# Altium PCB FlameClock_1.1_sh2.PcbDoc
Units mm, origin at the board's own origin, x right, y up, seen from the top; angles counter-clockwise.
Board outline 75.8 x 54.1 mm, 2 copper layers (Top, Bottom); 41 components, 272 nets, 184 pads, 44 vias.
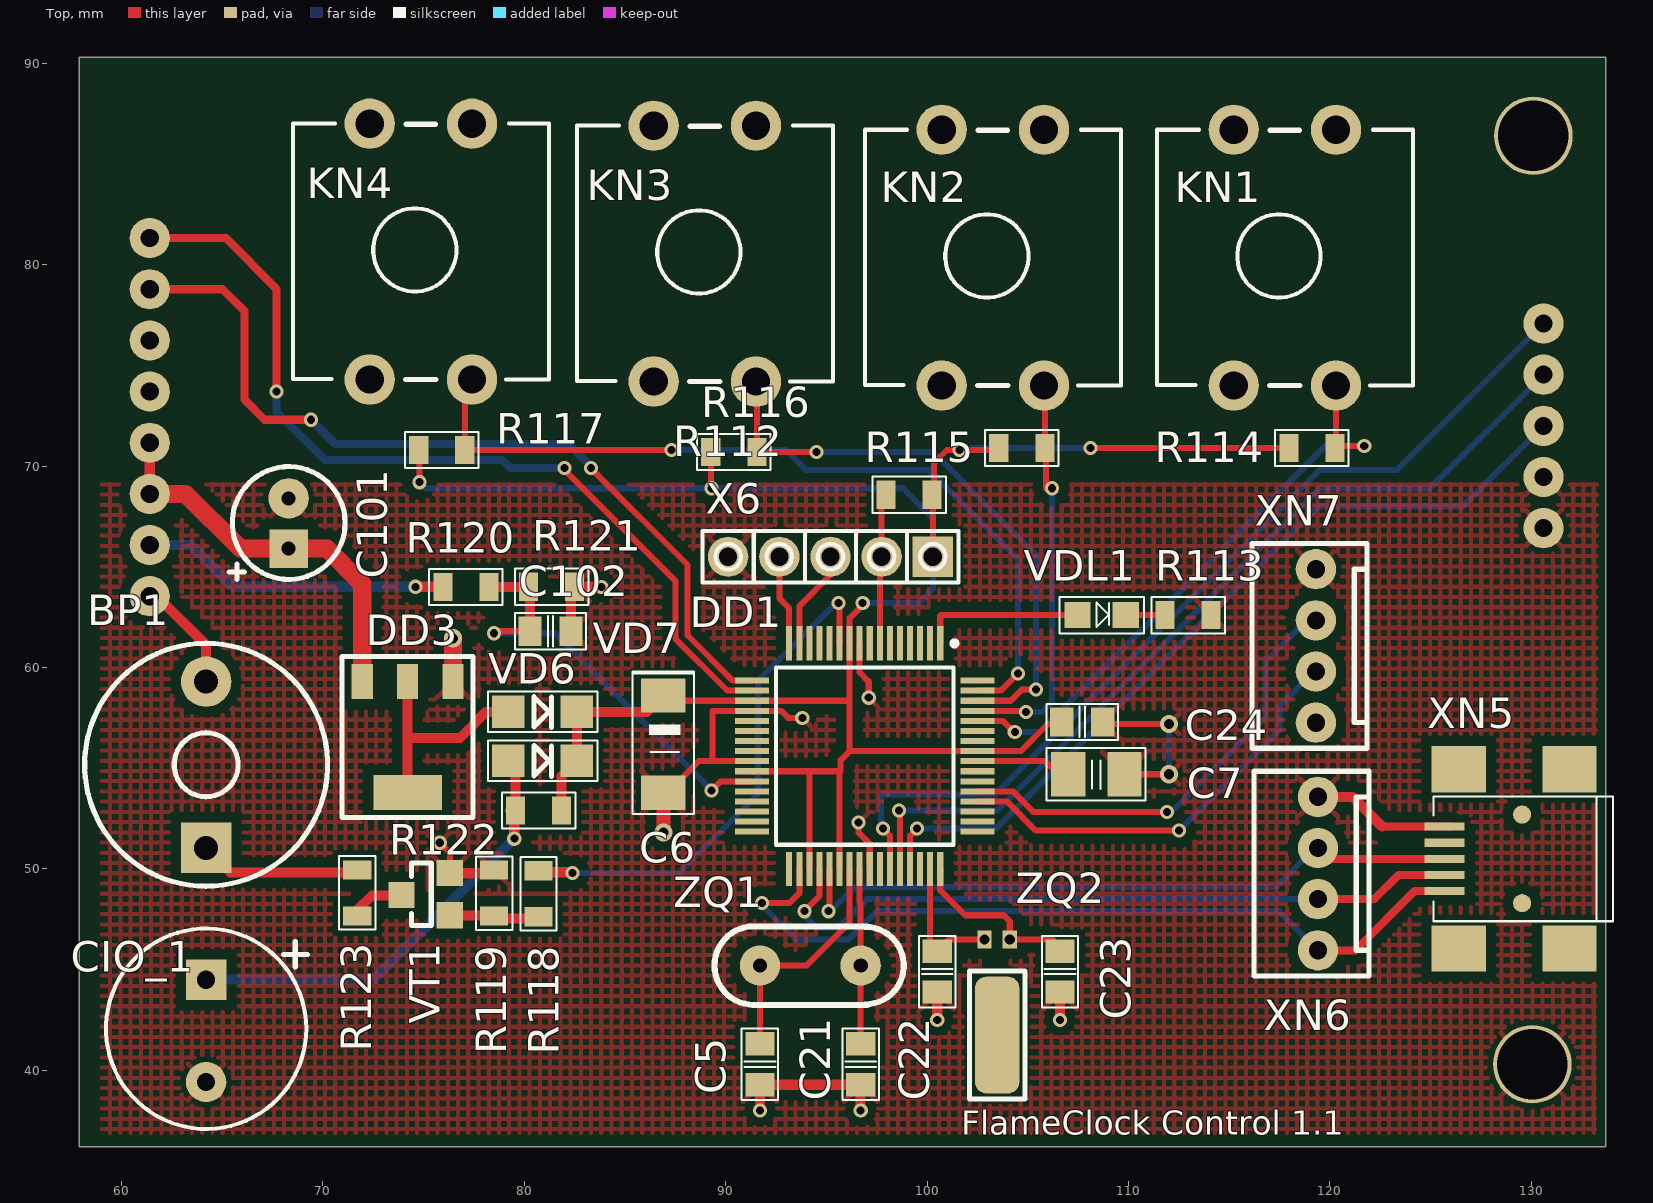
[diagram p0: Top view]
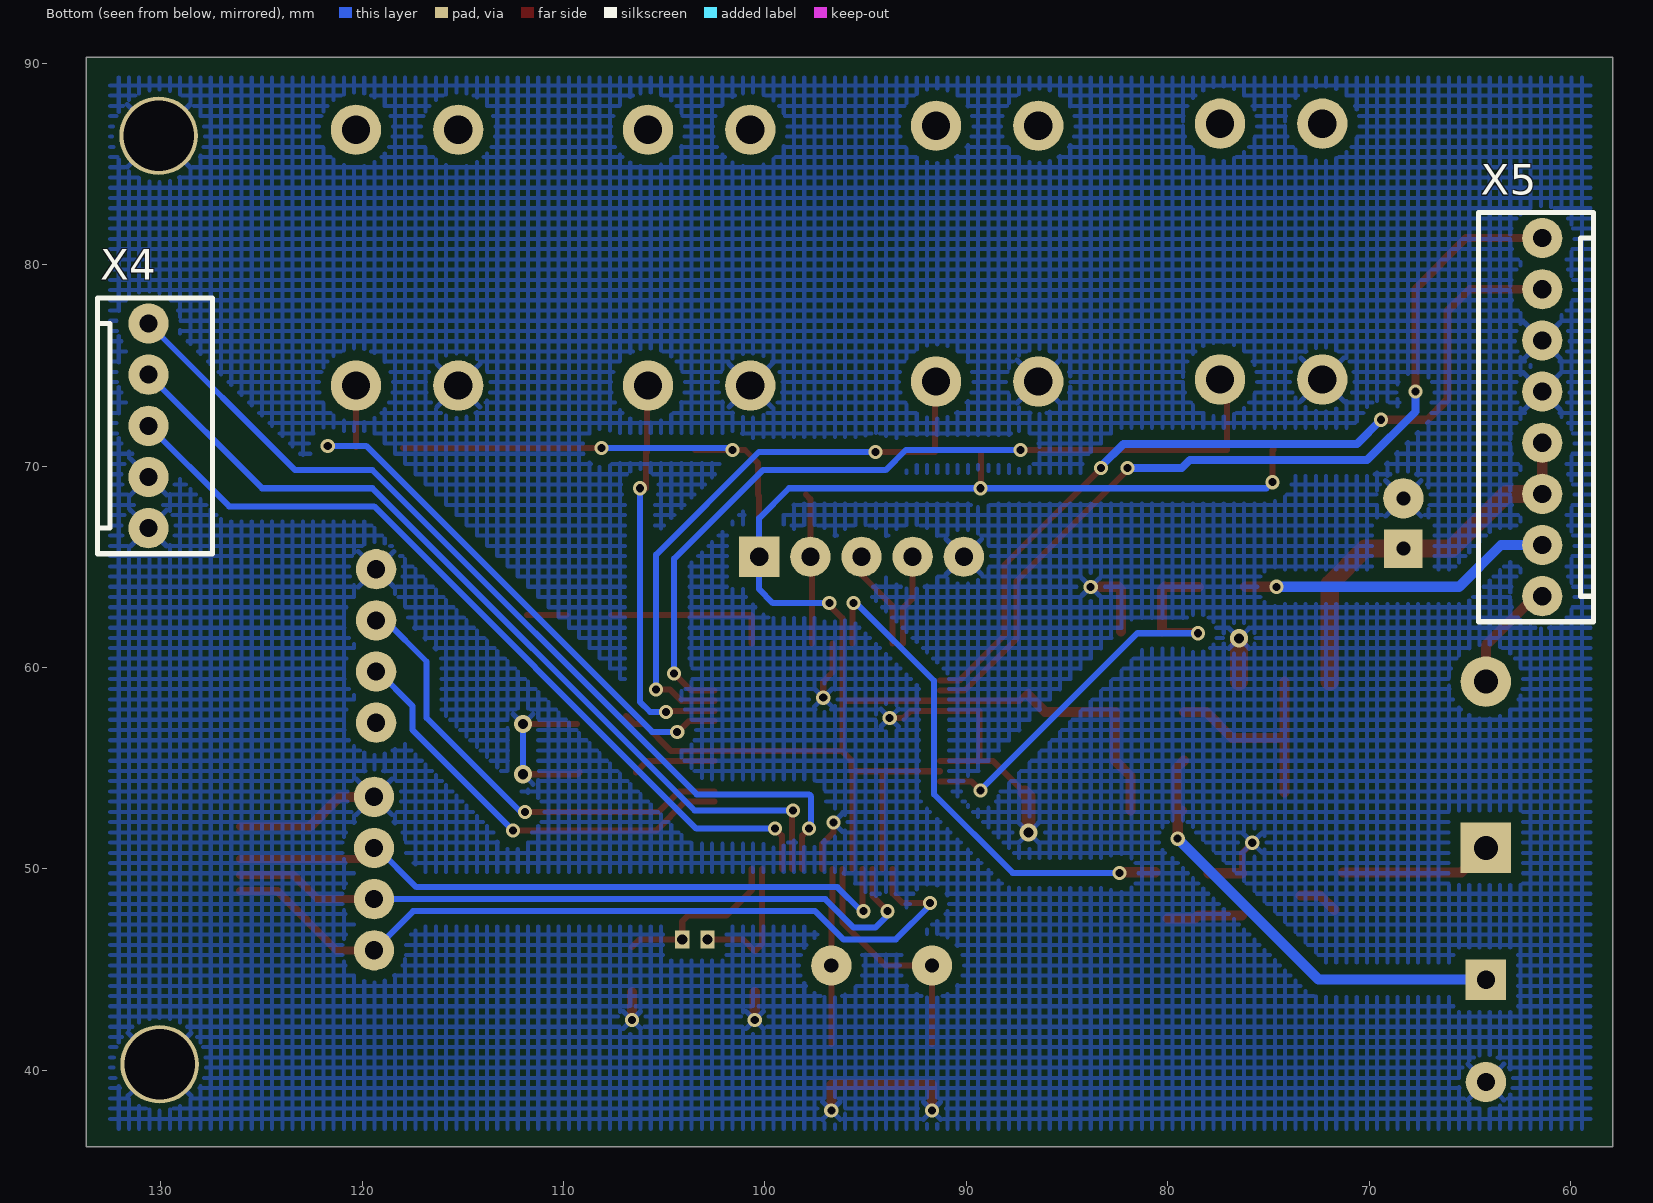
[diagram p1: Bottom view, seen from below]

## Layer stack, top to bottom
Top Solder: solder mask 0.0102, Solder Resist, Dk 3.5
Top: signal copper 0.0356
Dielectric 1: dielectric 0.32, FR-4, Dk 4.8
Bottom: signal copper 0.0356
Bottom Solder: solder mask 0.0102, Solder Resist, Dk 3.5

## Board outline
57.9,36.2 133.7,36.2 133.7,90.3 57.9,90.3

## Design rules (kind name [scope] priority, off if disabled: settings)
Clearance [All] p1: gap=0.2 ignorepadtopadclearanceinfootprint=TRUE except(0.5: Arc-Fill Arc-Poly Arc-Region Track-Fill Track-Poly Track-Region SMDPad-Fill SMDPad-Poly SMDPad-Region THPad-Fill THPad-Poly THPad-Region Via-Fill Via-Poly Via-Region Fill-Fill Fill-Poly Fill-Region Poly-Poly Poly-Region Region-Region)
Clearance Clearance_poligon [InPolygon] p2: gap=0.5 ignorepadtopadclearanceinfootprint=TRUE
PolygonConnect [All] p1: connectstyle=Relief reliefconductorwidth=0.254 reliefentries=4 polygonreliefangle="45 Angle" airgapwidth=0.254
RoutingVias [All] p1: holewidth=0.4 width=0.7 viastyle="Through Hole" minholewidth=0.4 minwidth=0.7 maxholewidth=0.9 maxwidth=1.5
SolderMaskExpansion [All] p1: expansion=0.102
Width [All] p1: maxlimit=0.9 minlimit=0.3 preferedwidth=0.5 minimp=50.000000 maximp=50.000000 favimp=50.000000
30 further rules are at their usual default settings.

## Components (designator, comment, footprint, x,y, rotation, side; value= is the part's Value field where it differs from the comment)
BP1 "*" ZIPPER 64.2,51.045 r90 top (schematic designator BP?)
C5 "33p" CC0805_S 91.7,40.3 r270 top
C6 "47uf 10v" CC0805_C_TANTAL_POLAR 86.9,56.2 r90 top
C7 "10uf" CC0805_B 108.4,54.7 r0 top
C21 "33p" CC0805_S 96.7,40.3 r270 top
C22 "33p" CC0805_S 100.5,44.9 r270 top
C23 "33p" CC0805_S 106.6,44.9 r270 top
C24 "C0805_S" CC0805_S 107.7,57.3 r0 top value=220n
C101 "100uf 25v" CE2.5 68.3,68.4 r270 top (schematic designator CIO1)
C102 "33p" CC0805_S 81.3,61.8 r180 top
CIO_1 "*" CE10 64.2,39.42 r90 top
DD1 "PIC24FJ64GB106" TQFP-64 96.9,55.6 r270 top
DD3 "LD1117S" SOT223 76.45,59.3 r180 top value=3.3v
KN1 "*" KNOP_12X12 115.22,74 r90 top
KN2 "*" KNOP_12X12 100.72,74 r90 top
KN3 "*" KNOP_12X12 86.42,74.2 r90 top
KN4 "*" KNOP_12X12 72.32,74.3 r90 top
R112 "100k" R0805_S 99.1,68.58 r180 top
R113 "10k" R0805_S 112.957,62.6 r180 top
R114 "10k" R0805_S 119.1,70.9 r0 top
R115 "10k" R0805_S 104.7,70.9 r0 top
R116 "10k" R0805_S 90.4,70.7 r0 top
R117 "10k" R0805_S 75.9,70.8 r0 top
R118 "10k" R0805_S 80.7,48.768 r270 top (schematic designator R?)
R119 "100k" R0805_S 78.5,48.8 r90 top (schematic designator R?)
R120 "10k" R0805_S 77.1,64 r0 top
R121 "10k" R0805_S 81.354,64.008 r0 top
R122 "100R" R0805_S 80.7,52.9 r180 top
R123 "9R1" R0805_S 71.7,48.8 r270 top
VD6 "*" DIOD_SOD123 79.196,57.8 r0 top
VD7 "*" DIOD_SOD123 79.2,55.372 r0 top
VDL1 "*" LED0805 109.8,62.6 r180 top
VT1 "*" SOT-23 75.1,48.7 r90 top (schematic designator VT?)
X4 "KONN_5_2,5" KONN_5_2.5MM 130.6,77.08 r270 bottom locked
X5 "KONN_8_2.5MM" KONN_8_2.5MM 61.4,63.54 r90 bottom locked
X6 "CONN_PRG2" CONN_PRG2 100.28,65.5 r270 top
XN5 "USB_MINI" USB_MINI 125.69,50.5 r90 top
XN6 "KONN_4_2.5MM" KONN_4_2.5MM 119.4,45.96 r90 top
XN7 "KONN_4_2.5MM" KONN_4_2.5MM 119.3,57.26 r90 top
ZQ1 "16mHz" ZQ 91.7,45.2 r0 top
ZQ2 "32768Hz" ZQ_CLOCK 102.85,46.5 r0 top

## Footprints (in the part's own frame and the unit in brackets; to place one, negate y for a bottom-side part, rotate by r counter-clockwise, add the part's x,y. Pads: shape width x height; smd on the part's side, far side on the other; paste and mask are expansions set on the pad)
CC0805_B [mm]
  rect 1.7x2.2 smd: 1(-1.397,0) 2(1.397,0)
  silkscreen extent -2.46,-1.3 2.44,1.3
CC0805_C_TANTAL_POLAR [mm]
  rect 1.7x2.2 smd: 1(-2.413,0) 2(2.413,0)
  silkscreen extent -3.47,-1.52 3.6,1.52
CC0805_S [mm]
  rect 1.15x1.45 smd: 1(-1.016,0) 2(1.016,0)
  silkscreen extent -1.77,-0.91 1.77,0.9
CE2.5 [mm]
  rect 1.9x1.9 hole 0.7: 1(2.5,0)
  round 2 hole 0.7: 2(0,0)
  silkscreen extent -1.57,-2.96 4.03,2.8
CE10 [mm]
  rect 2x2 hole 0.9: 1(5.08,0)
  round 2 hole 0.9: 2(0,0)
  silkscreen extent -2.33,-5.02 7.62,4.97
CONN_PRG2 [mm]
  rect 2x2 hole 0.9: 1(0,0)
  round 2 hole 0.9: 2(0,-2.54) 3(0,-5.08) 4(0,-7.62) 5(0,-10.16)
  silkscreen extent -1.27,-11.43 1.27,1.27
DIOD_SOD123 [mil]
  rect 64x64 smd: 1(0,0) 2(134,0)
  silkscreen extent -40,-39 175,39
KNOP_12X12 [mm]
  round 2.5 hole 1.4: 1(0,0) 2(0,-5.08) 3(12.7,-5.08) 4(12.7,0)
  silkscreen extent 0,-8.9 12.7,3.81
KONN_4_2.5MM [mm]
  round 2 hole 0.9: 1(0,0) 2(2.54,0) 3(5.08,0) 4(7.62,0)
  silkscreen extent -1.27,-2.54 8.89,3.18
KONN_5_2.5MM [mm]
  round 2 hole 0.9: 1(0,0) 2(2.54,0) 3(5.08,0) 4(7.62,0) 5(10.16,0)
  silkscreen extent -1.27,-2.54 11.43,3.18
KONN_8_2.5MM [mm]
  round 2 hole 0.9: 1(0,0) 2(2.54,0) 3(5.08,0) 4(7.62,0) 5(10.16,0) 6(12.7,0) 7(15.24,0) 8(17.78,0)
  silkscreen extent -1.27,-2.54 19.05,3.17
LED0805 [mm]
  rect 1.3x1.3 smd: 1(-0.06,0) 2(2.34,0)
  silkscreen extent -0.96,-0.9 3.24,0.9
R0805_S [mm]
  rect 0.95x1.4 smd: 1(-1.143,0) 2(1.143,0)
  silkscreen extent -1.83,-0.9 1.82,0.9
SOT223 [mm]
  rect 1.05x1.75 smd: 1(4.5,0) 2(2.25,0) 3(0,0)
  rect 3.4x1.75 smd: 4(2.25,5.5)
  silkscreen extent -1,-1.25 5.5,6.75
SOT-23 [mm]
  rect 1.3x1.3 smd: 1(-1,-1.2) 2(0,1.2) 3(1.1,-1.2)
  silkscreen extent -1.5,-0.28 1.6,0.7
TQFP-64 [mm]
  rect 1.7x0.3 smd: 1(-5.6,3.75) 2(-5.6,3.25) 3(-5.6,2.75) 4(-5.6,2.25) 5(-5.6,1.75) 6(-5.6,1.25) 7(-5.6,0.75) 8(-5.6,0.25) 9(-5.6,-0.25) 10(-5.6,-0.75) 11(-5.6,-1.25) 12(-5.6,-1.75) 13(-5.6,-2.25) 14(-5.6,-2.75) 15(-5.6,-3.25) 16(-5.6,-3.75) 33(5.6,-3.75) 34(5.6,-3.25) 35(5.6,-2.75) 36(5.6,-2.25) 37(5.6,-1.75) 38(5.6,-1.25) 39(5.6,-0.75) 40(5.6,-0.25) 41(5.6,0.25) 42(5.6,0.75) 43(5.6,1.25) 44(5.6,1.75) 45(5.6,2.25) 46(5.6,2.75) 47(5.6,3.25) 48(5.6,3.75)
  rect 0.3x1.7 smd: 17(-3.75,-5.6) 18(-3.25,-5.6) 19(-2.75,-5.6) 20(-2.25,-5.6) 21(-1.75,-5.6) 22(-1.25,-5.6) 23(-0.75,-5.6) 24(-0.25,-5.6) 25(0.25,-5.6) 26(0.75,-5.6) 27(1.25,-5.6) 28(1.75,-5.6) 29(2.25,-5.6) 30(2.75,-5.6) 31(3.25,-5.6) 32(3.75,-5.6) 49(3.75,5.6) 50(3.25,5.6) 51(2.75,5.6) 52(2.25,5.6) 53(1.75,5.6) 54(1.25,5.6) 55(0.75,5.6) 56(0.25,5.6) 57(-0.25,5.6) 58(-0.75,5.6) 59(-1.25,5.6) 60(-1.75,5.6) 61(-2.25,5.6) 62(-2.75,5.6) 63(-3.25,5.6) 64(-3.75,5.6)
  silkscreen extent -5.72,-4.4 4.4,4.57
USB_MINI [mm]
  rect 0.4x2 smd: 1(-1.6,0) 2(-0.8,0) 3(0,0) 4(0.8,0) 5(1.6,0)
  rect 2.3x2.7 smd: 6(-4.45,-0.7) 7(4.45,-0.7) 8(-4.45,-6.2) 9(4.45,-6.2)
  round 0.9 smd: 10(-2.2,-3.85) 11(2.2,-3.85)
  silkscreen extent -3.1,-8.35 3.1,0.55
ZIPPER [mm]
  rect 2.5x2.5 hole 1.2: 1(0,0)
  round 2.5 hole 1.2: 2(8.255,0)
  silkscreen extent -1.91,-6.03 10.16,6.03
ZQ [mm]
  round 2 hole 0.7: 1(0,0) 2(5,0)
  silkscreen extent -2.26,-1.96 7.14,1.95
ZQ_CLOCK [mm]
  rect 0.7x0.9 hole 0.5: 1(0,0) 2(1.25,0)
  rrect50% 2.2x5.8 smd: 3(0.625,-4.75)
  silkscreen extent -0.75,-7.93 2,-1.58

## Part data
BP1: library part Buzzer
C5 C21 C22 C23 C102: library part C0805_S
C6: library part C0805_C_TAN_POLAR
C7: library part C0805_B
C101: library part CE2.5_5MM
CIO_1: library part CE5.0_10MM
KN1 KN2 KN3 KN4: library part KNOP_12X12
R112 R113 R114 R115 R116 R117 R118 R119 R120 R121 R122 R123: library part R0805_S
VD6 VD7: library part DIODE_SOD123
VDL1: library part L_DIODE0805
VT1: library part NPN_SOT23
ZQ1: library part ZQ
ZQ2: library part ZQ_CLOCK

## Free pads (board coordinates)
  round 2 on Drill Drawing: 3(104,86.5)
  round 3.9 hole 3.5: 6(130.1,86.4) 7(130.048,40.3)

## Via types
v1: diameter 0.7, hole 0.4, Top to Bottom, 40 vias
v2: diameter 0.9, hole 0.5, Top to Bottom, 4 vias

## Nets (pads, with @x,y where several pads share a name; then routed paths per layer and width w, separated by ;. In a path a pad name is that pad's centre, name@x,y a point inside that pad or via, vN(x,y) a via of type N, cw(c..) or ccw(c..) an arc to the next point about the centre after c; other vN are vias at no path point)
12_PWR: R120.1 X5.2 | length 15.6
  Top w0.5: v1(74.6,64.008) 76.149,64.008 R120.1@76.157,64
  Bottom w0.5: X5.2 63.452,66.08 65.524,64.008 v1(74.6,64.008)
+3.3v: C6.2 C24.1 DD1.10 DD1.19 DD1.26 DD1.35 DD1.38 DD1.57 R112.1 R114.1 R115.1 R116.1 R117.1 R122.1 VD6.2 VD7.2 X6.1 | length 116.4
  Top w0.3: R117.1 74.757,70.843 74.8,70.8 v1(74.8,69.2) ; C6.2@86.9,58.813 87.363,58.35 DD1.19 96.1,58.35 96.15,58.4 ; R116.1 89.257,68.943 v1(89.3,68.9) ; DD1.26 93.3,54.85 94.15,54.85 ; DD1.35 94.15,54.85 ; DD1.38 95.65,54.75 95.55,54.85 ; v1(96.8,63.2) 96.8,63.1 96.15,62.45 DD1.10 96.15,58.4 ; X6.1 100.28,68.517 100.343,68.58 100.343,70.157 100.986,70.8 v1(101.6,70.8) 103.457,70.8 R115.1 ; C24.1@106.884,57.6 106.484,57.2 106,57.2 104.65,55.85 DD1.57 96.15,55.85 ; v1(108.1,70.9) R114.1 ; 94.15,54.85 95.55,54.85 ; 95.55,54.85 95.7,54.85 95.7,55.4 96.15,55.85 ; 96.15,55.85 96.15,58.4
  Top w0.5: R122.1 81.843,54.611 VD7.2 82.604,57.796 VD6.2 86.087,57.8 C6.2
  Bottom w0.3: v1(74.8,69.2) 75.1,68.9 v1(89.3,68.9) 98.8,68.9 100.28,67.42 X6.1 99.6,64.82 100.3,64.82 100.3,63.9 99.6,63.2 v1(96.8,63.2) ; v1(101.6,70.8) 101.7,70.9 v1(108.1,70.9)
+12v: BP1.2 X5.1 | length 5.6
  Top w0.5: X5.1 61.76,63.54 64.2,61.1 BP1.2
+50V: 
+250v: 
A001: 
A002: 
A003: 
A004: 
A005: 
A006: 
A007: 
A008: 
A009: 
A010: 
A011: 
A012: 
A013: 
A014: 
A015: 
A016: 
A017: 
A018: 
A019: 
A020: 
A021: 
A022: 
A023: 
A024: 
A025: 
A026: 
A027: 
A028: 
A029: 
A030: 
A031: 
A032: 
A033: 
A034: 
A035: 
A036: 
A037: 
A038: 
A039: 
A040: 
A041: 
A042: 
A043: 
A044: 
A045: 
A046: 
A047: 
A048: 
A049: 
A050: 
A051: 
A052: 
A053: 
A054: 
A055: 
A056: 
A057: 
A058: 
A059: 
A060: 
A061: 
A062: 
A063: 
A064: 
A065: 
A066: 
A067: 
A068: 
A069: 
A070: 
A071: 
A072: 
A073: 
A074: 
A075: 
A076: 
A077: 
A078: 
A079: 
A080: 
A081: 
A082: 
A083: 
A084: 
A085: 
A086: 
A087: 
A088: 
A089: 
A090: 
A091: 
A092: 
A093: 
A094: 
A095: 
A096: 
A097: 
A098: 
A099: 
A100: 
BUZZER: DD1.11 R118.1 | length 25.9
  Top w0.3: v1(95.6,63.2) 95.65,63.15 DD1.11
  Top w0.5: R118.1@80.6,49.834 82.366,49.834 v1(82.4,49.8)
  Bottom w0.3: v1(82.4,49.8) 87.7,49.8 91.6,53.7 91.6,59.348 95.452,63.2 v1(95.6,63.2)
D+: DD1.37 XN5.3 XN6.3 | length 34.6
  Top w0.3: v1(95.1,47.9) 95.15,47.95 DD1.37
  Top w0.4: XN6.3@119.94,50.5 XN5.3 XN5.3@126.05,50.5
  Top w0.5: XN6.3 XN6.3@119.94,50.5
  Bottom w0.3: v1(95.1,47.9) 95.2,47.9 96.4,49.1 117.3,49.1 119.24,51.04 XN6.3
D-: DD1.36 XN5.2 XN6.2 | length 36.1
  Top w0.3: v1(93.9,47.9) 94.65,48.65 DD1.36
  Top w0.4: XN6.2 122.2,48.5 123.4,49.7 XN5.2 XN5.2@126.05,49.7
  Bottom w0.3: v1(93.9,47.9) 93.9,47.7 94.5,47.1 95.6,47.1 97,48.5 XN6.2
"Display Data": DD1.43 X4.1 | length 46.4
  Top w0.3: v1(97.8,52) 98.15,51.65 DD1.43
  Bottom w0.3: v1(97.8,52) 97.7,52.1 97.7,53.6 97.8,53.7 103.38,53.7 119.48,69.8 123.32,69.8 X4.1
GND: C5.2 C6.1 C7.2 C21.2 C22.2 C23.2 C24.2 C101.2 C102.1 CIO_1.2 DD1.9 DD1.20 DD1.25 DD1.41 DD3.3 KN1.1 KN2.1 KN3.1 KN4.1 pad.6 pad.7 R113.1 R119.2 R121.2 VT1.3 X4.4 X4.5 X5.5 X5.6 X6.5 XN5.5 XN6.4 XN7.4 | length 54.1
  Top w0.3: v1@75.9,51.2 76.3,50.8 VT1.3 ; C6.1@87.1,53.787 88.663,55.35 89.35,55.35 ; DD1.25 89.35,55.35 ; v1(93.8,57.5) 93.1,57.5 92.75,57.85 DD1.20 89.35,57.85 89.35,55.35 ; v1(96.6,52.3) 96.6,51.8 97.15,51.25 DD1.41 ; DD1.9 96.65,59.75 97.1,59.3 v1(97.1,58.5) ; C7.2@109.197,54.8 109.297,54.7 C7.2 v2(112,54.7) ; 109.316,57.2 v2(112,57.2)
  Top w0.4: 122.6,52.1 XN5.5 XN5.5@126.05,52.1
  Top w0.5: VT1.3 76.316,49.784 R119.2@77.973,49.784 ; C102.1 82.316,63.881 82.443,64.008 R121.2 83.812,64.008 v1(83.82,64) ; v1(91.7,38) C5.2 C21.2 v1(96.7,38) ; v1(100.5,42.5) C22.2 ; v1(106.6,42.5) C23.2 ; XN6.4 121.12,53.58 122.6,52.1
  Top w0.7: v2(86.9,51.8) 86.9,53.587 C6.1@87.1,53.787
  Top w0.9: DD3.3 v2(76.45,61.45)
  Bottom w0.3: v2(112,54.7) v2(112,57.2)
  other v1: 75.8,51.3
INCOM_PWR: C102.2 DD1.27 R120.2 R121.1 | length 22
  Top w0.3: v1(78.5,61.7) 78.6,61.8 C102.2 ; v1(89.3,53.9) 89.75,54.35 DD1.27
  Top w0.5: R120.2@78.443,64 80.149,64 80.157,64.008 80.284,63.881 C102.2
  Bottom w0.3: v1(78.5,61.7) 81.5,61.7 v1(89.3,53.9)
KN1: DD1.60 KN1.2 R114.2 | length 29.8
  Top w0.3: DD1.60 103.75,57.35 104.3,56.8 v1(104.35,56.8) ; KN1.2 120.3,70.957 120.343,71 v1(121.7,71)
  Bottom w0.3: v1(104.35,56.8) 105.6,56.8 119.8,71 v1(121.7,71)
KN2: DD1.61 KN2.2 R115.2 | length 20
  Top w0.3: DD1.61 104.6,57.85 104.65,57.8 v1(104.9,57.8) ; KN2.2 105.843,73.957 R115.2 105.843,70.7 105.9,70.7 105.9,68.9 v1(106.2,68.9)
  Bottom w0.3: v1(104.9,57.8) 105.7,57.8 106.2,58.3 v1(106.2,68.9)
KN3: DD1.62 KN3.2 R116.2 | length 29.3
  Top w0.3: KN3.2 91.543,74.157 R116.2 v1(94.5,70.7) ; DD1.62 104.15,58.35 104.7,58.9 v1(105.4,58.9)
  Bottom w0.3: v1(94.5,70.7) 100.3,70.7 105.4,65.6 v1(105.4,58.9)
KN4: DD1.63 KN4.2 R117.2 | length 41.4
  Top w0.3: KN4.2 77.043,73.943 R117.2 v1(87.3,70.8) ; DD1.63 103.65,58.85 v1(104.5,59.7)
  Bottom w0.3: v1(87.3,70.8) 93,70.8 94,69.8 100.1,69.8 104.5,65.4 v1(104.5,59.7)
Latch: DD1.45 X4.3 | length 41.7
  Top w0.3: DD1.45 99.15,51.65 v1(99.5,52) v1@99.6,52.1
  Bottom w0.3: v1(99.5,52) 103.4,52 119.4,68 126.6,68 X4.3
NetBP1_1: BP1.1 R123.1 | length 7.6
  Top w0.5: BP1.1 65.414,49.831 R123.1@71.3,49.831
NetC5_1: C5.1 DD1.39 ZQ1.1 | length 11.9
  Top w0.3: C5.1 ZQ1.1 94,45.2 96.15,47.35 DD1.39
NetC7_1: C7.1 DD1.56 | length 4.1
  Top w0.3: DD1.56 105.853,55.35 C7.1@106.403,54.8
NetC14_1: 
NetC16_1: 
NetC19_1: 
NetC20_2: 
NetC21_1: C21.1 DD1.40 ZQ1.2 | length 8.7
  Top w0.3: DD1.40 96.65,48.35 96.7,48.3 ZQ1.2 C21.1
NetC22_1: C22.1 DD1.47 ZQ2.1 | length 6.8
  Top w0.3: DD1.47 100.15,46.266 C22.1 101.084,46.5 ZQ2.1
NetC23_1: C23.1 DD1.48 ZQ2.2 | length 8.7
  Top w0.3: DD1.48 100.65,48.95 101.9,47.7 103.8,47.7 104.1,47.4 ZQ2.2 106.216,46.5 C23.1@106.6,46.116
NetCIO_1_1: CIO_1.1 R122.2 VD7.1 | length 22.6
  Top w0.5: VD7.1 79.557,55.015 R122.2 79.3,52.9 79.5,52.7 v1(79.5,51.5)
  Bottom w0.5: CIO_1.1 72.5,44.5 v1(79.5,51.5)
NetD1_1: 
NetD1_5: 
NetD2_1: 
NetD2_5: 
NetDD1_1: DD1.1 VDL1.2 | length 8.3
  Top w0.3: DD1.1 100.65,62.55 100.7,62.6 VDL1.2 VDL1.2@107.6,62.6
NetDD2_1: 
NetDD2_5: 
NetDD3_2: DD3.2 DD3.4 VD6.1 | length 11
  Top w0.5: DD3.4 74.2,56.5 ; DD3.2 74.2,56.5 ; VD6.1 78.1,57.8 76.8,56.5 74.2,56.5
NetL1_1: 
NetL2_2: 
NetR1_2: 
NetR2_2: 
NetR3_2: 
NetR4_2: 
NetR5_2: 
NetR6_2: 
NetR7_2: 
NetR8_2: 
NetR9_2: 
NetR10_2: 
NetR11_2: 
NetR12_2: 
NetR13_2: 
NetR14_2: 
NetR15_2: 
NetR16_2: 
NetR17_2: 
NetR18_2: 
NetR19_2: 
NetR20_2: 
NetR21_2: 
NetR22_2: 
NetR23_2: 
NetR24_2: 
NetR25_2: 
NetR26_2: 
NetR27_2: 
NetR28_2: 
NetR29_2: 
NetR30_2: 
NetR31_2: 
NetR32_2: 
NetR33_2: 
NetR34_2: 
NetR35_2: 
NetR36_2: 
NetR37_2: 
NetR38_2: 
NetR39_2: 
NetR40_2: 
NetR41_2: 
NetR42_2: 
NetR43_2: 
NetR44_2: 
NetR45_2: 
NetR46_2: 
NetR47_2: 
NetR48_2: 
NetR49_2: 
NetR50_2: 
NetR51_2: 
NetR52_2: 
NetR53_2: 
NetR54_2: 
NetR55_2: 
NetR56_2: 
NetR57_2: 
NetR58_2: 
NetR59_2: 
NetR60_2: 
NetR61_2: 
NetR62_2: 
NetR63_2: 
NetR64_2: 
NetR65_2: 
NetR66_2: 
NetR67_2: 
NetR68_2: 
NetR69_2: 
NetR70_2: 
NetR71_2: 
NetR72_2: 
NetR73_2: 
NetR74_2: 
NetR75_2: 
NetR76_2: 
NetR77_2: 
NetR78_2: 
NetR79_2: 
NetR80_2: 
NetR81_2: 
NetR82_2: 
NetR83_2: 
NetR84_2: 
NetR85_2: 
NetR86_2: 
NetR87_2: 
NetR88_2: 
NetR89_2: 
NetR90_2: 
NetR91_2: 
NetR92_2: 
NetR93_2: 
NetR94_2: 
NetR95_2: 
NetR96_2: 
NetR97_2: 
NetR98_2: 
NetR99_2: 
NetR100_2: 
NetR113_2: R113.2 VDL1.1 | length 2
  Top w0.3: VDL1.1 R113.2
NetR118_2: R118.2 R119.1 VT1.1 | length 3.8
  Top w0.5: VT1.1@76.3,47.684 78.5,47.684 78.643,47.541 79.993,47.541 80,47.548
NetR123_2: R123.2 VT1.2 | length 2
  Top w0.5: R123.2@71.728,47.972 72.439,48.684 VT1.2@73.4,48.684
NetU1_9: 
NetU2_9: 
NetU3_9: 
NetU4_9: 
NetU5_9: 
NetU6_9: 
NetU7_9: 
NetU8_9: 
NetU9_9: 
NetU10_9: 
NetU11_9: 
NetU12_9: 
NetVD1_2: 
PGC: DD1.16 X6.4 | length 4.5
  Top w0.3: X6.4 92.66,63.44 93.15,62.95 DD1.16
PGD: DD1.15 X6.3 | length 4.9
  Top w0.3: DD1.15 93.65,63.05 95.2,64.6 X6.3
"Register conn": 
RX_PROG: DD1.53 XN7.3 | length 22.8
  Top w0.3: DD1.53 104.25,53.85 105.268,52.832 v1(111.9,52.832)
  Bottom w0.3: v1(111.9,52.832) 112.132,52.832 116.8,57.5 116.8,60.3 118.84,62.34 XN7.3
Shift: DD1.44 X4.2 | length 43.9
  Top w0.3: v1(98.6,52.9) 98.65,52.85 DD1.44
  Bottom w0.3: v1(98.6,52.9) 103.488,52.9 119.488,68.9 124.96,68.9 X4.2
StepUp1: DD1.17 X5.7 | length 42.6
  Top w0.3: v1(83.3,69.9) 88.1,65.1 88.1,61.6 90.35,59.35 DD1.17
  Top w0.4: X5.7 65.02,78.78 66.1,77.7 66.1,73.3 67.1,72.3 v1(69.4,72.3)
  Bottom w0.4: v1(69.4,72.3) 70.6,71.1 82.2,71.1 83.3,70 v1(83.3,69.9)
StepUp2: DD1.18 X5.8 | length 44.6
  Top w0.3: v1(82,69.9) 82,69.8 87.5,64.3 87.5,61.438 90.088,58.85 DD1.18
  Top w0.4: X5.8 65.18,81.32 67.7,78.8 v1(67.7,73.7)
  Bottom w0.4: v1(67.7,73.7) 67.7,72.7 70.1,70.3 78.9,70.3 79.3,69.9 v1(82,69.9)
  Bottom w0.5: X5.8@61.32,81.4 X5.8
TX_PROG: DD1.52 XN7.2 | length 21.4
  Top w0.3: DD1.52 103.95,53.35 105.4,51.9 v1(112.5,51.9)
  Bottom w0.3: v1(112.5,51.9) 117.5,56.9 117.5,58.1 119.2,59.8 XN7.2
U_PGM: DD1.7 R112.2 X6.2 | length 7.5
  Top w0.3: DD1.7 97.65,65.41 X6.2 97.74,68.363 R112.2
V_BUS: DD1.34 XN5.1 XN6.1 | length 40.9
  Top w0.3: v1(91.8,48.3) 93.162,48.3 93.65,48.788 DD1.34
  Top w0.4: XN6.1 121.26,45.96 124.2,48.9 XN5.1 XN5.1@126.05,48.9
  Bottom w0.3: v1(91.8,48.3) 91.8,48.2 93.5,46.5 96.1,46.5 97.5,47.9 117.46,47.9 XN6.1
VCC2: C101.1 DD3.1 X5.3 X5.4 | length 19.8
  Top w0.5: X5.3 X5.4
  Top w0.9: X5.3 63.18,68.62 65.9,65.9 C101.1 70.2,65.9 71.95,64.15 DD3.1
X1: 
X2: 
X3: 
X4: 
X5: 
X6: 
X7: 
X8: 
pads on no net: DD1.2 DD1.3 DD1.4 DD1.5 DD1.6 DD1.8 DD1.12 DD1.13 DD1.14 DD1.21 DD1.22 DD1.23 DD1.24 DD1.28 DD1.29 DD1.30 DD1.31 DD1.32 DD1.33 DD1.42 DD1.46 DD1.49 DD1.50 DD1.51 DD1.54 DD1.55 DD1.58 DD1.59 DD1.64 KN1.3 KN1.4 KN2.3 KN2.4 KN3.3 KN3.4 KN4.3 KN4.4 XN5.4 XN5.6 XN5.7 XN5.8 XN5.9 XN5.10 XN5.11 XN7.1 ZQ2.3

## Polygon pours and split planes (outlines as drawn)
GND on Bottom "gnd" (hatched 90Degree grid 0.508 track 0.203, remove dead copper, pour order 0): 59,89.3 59,37.1 132.5,37.1 132.5,45.6 132.5,89.3
GND on Top "gnd" (hatched 90Degree grid 0.508 track 0.203, remove dead copper, pour order 2): 133.252,69.1 59,69.1 59,36.9 133.148,36.9

## Silkscreen, mask and mechanical layers (free items; w line width, h text height)
Top Overlay:
  text "FlameClock Control 1.1" at 101.7,36.8 h1.2
Board:
  lines w0.2: 57.7,36.1 133.9,36.1 133.9,90.4 57.7,90.4 57.7,36.1